# Altium PCB RobotHead.PcbDoc
Units mm, origin at the board's own origin, x right, y up, seen from the top; angles counter-clockwise.
Board outline 98.18 x 50.64 mm, 2 copper layers (Top Layer, Bottom Layer); 29 components, 38 nets, 110 pads, 75 vias.
Unrouted connection lines stored in the file: 2.
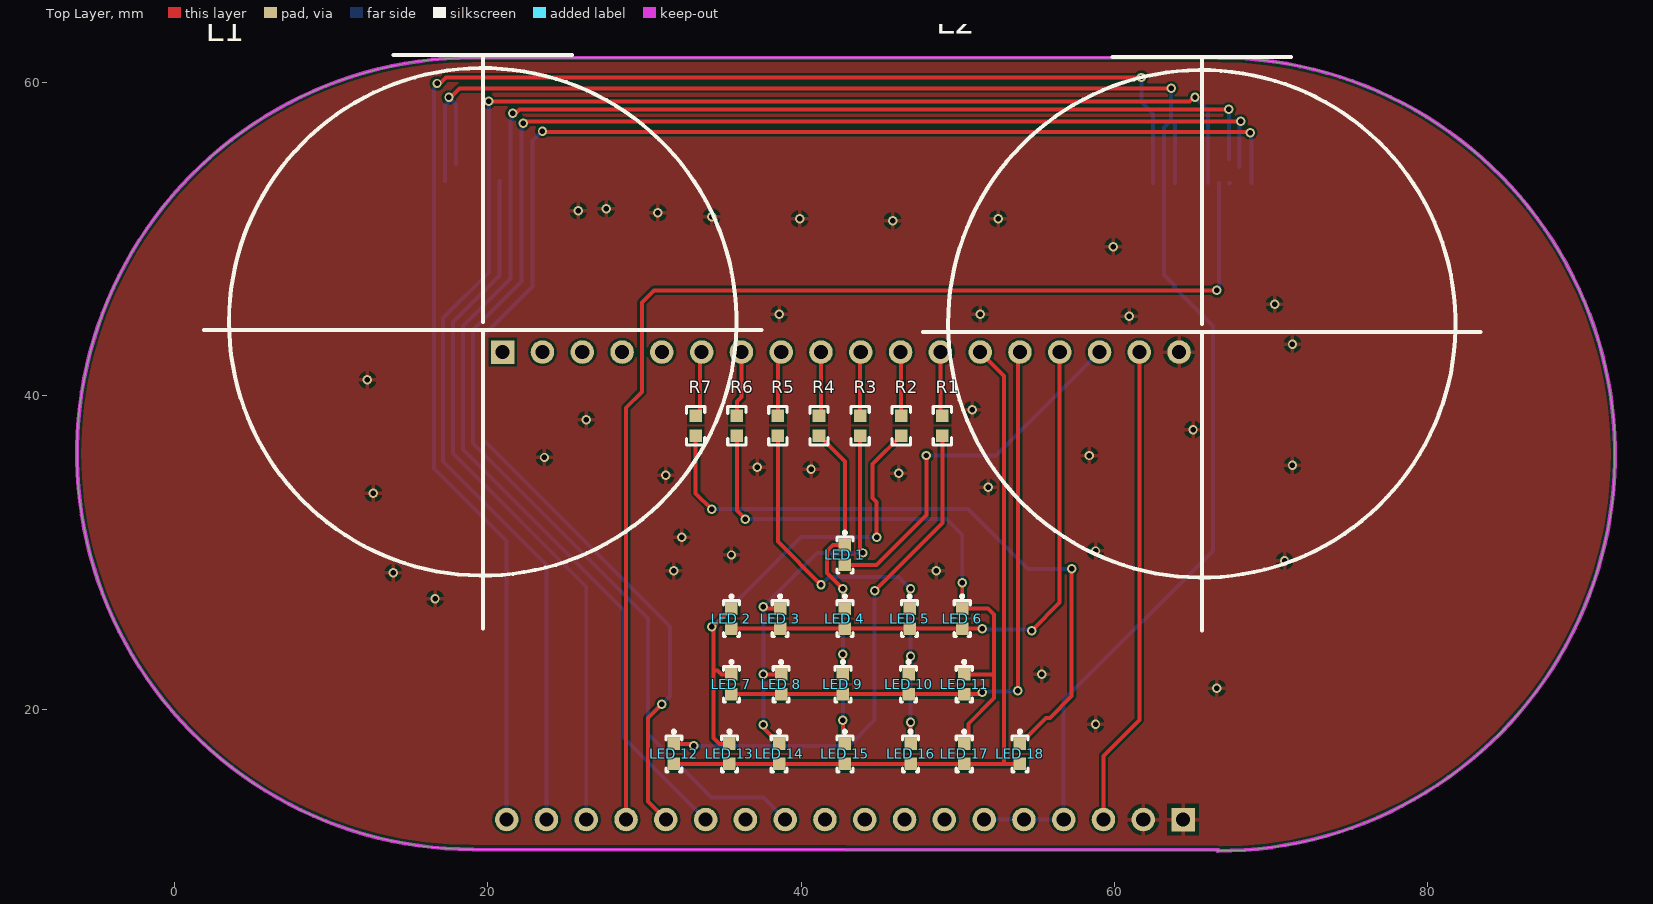
[diagram p0: Top Layer view]
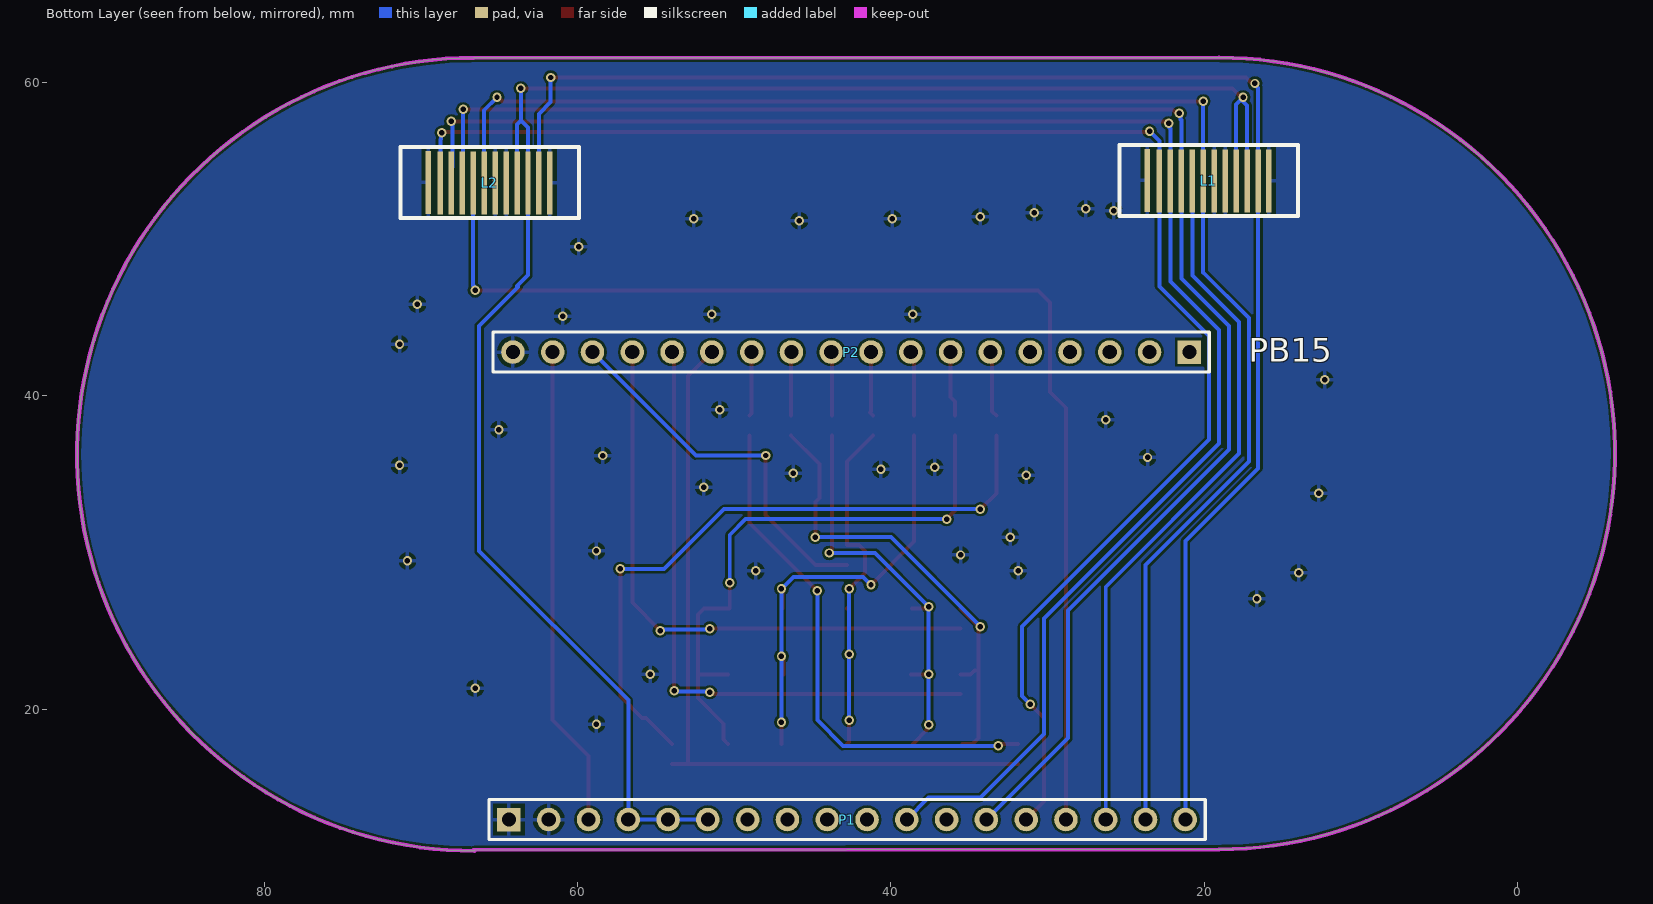
[diagram p1: Bottom Layer view, seen from below]
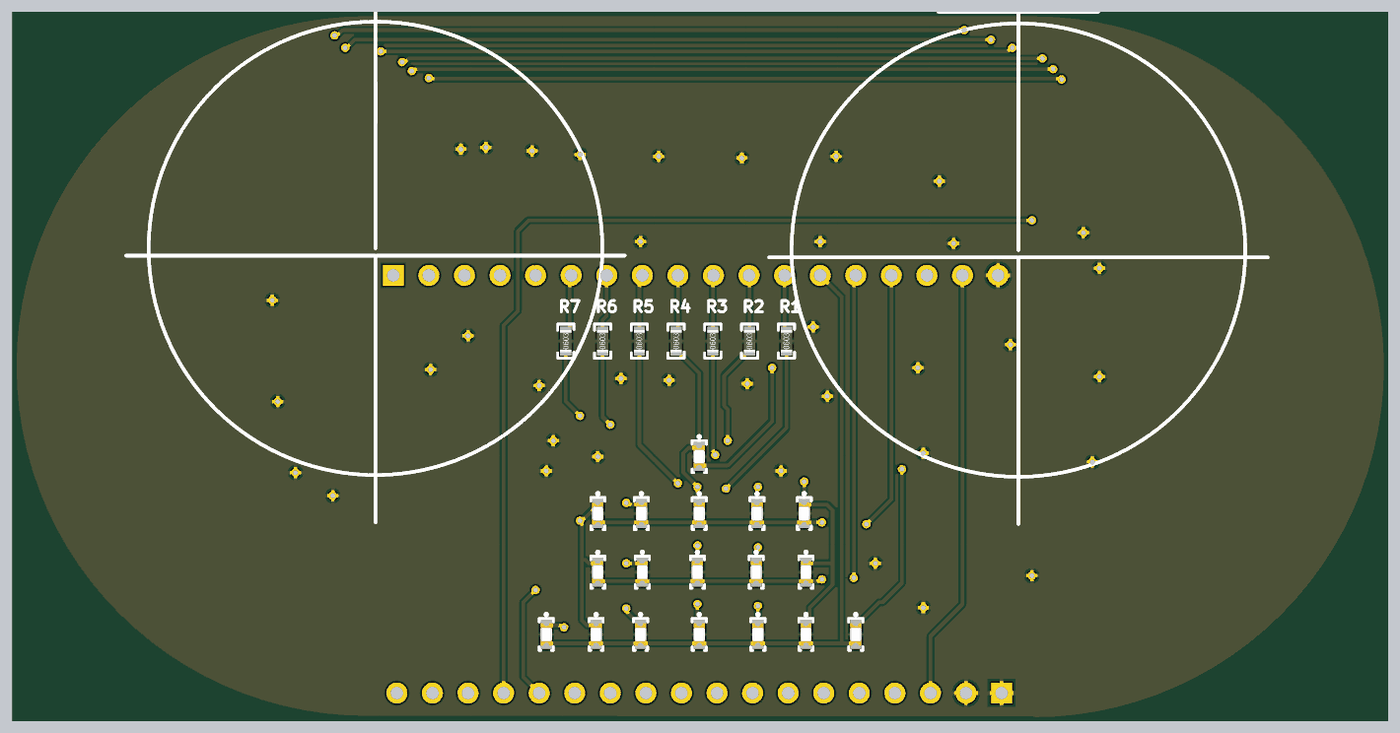
[diagram p2: 3D render of the assembled board from above, using the file's embedded part models]

## Layer stack, top to bottom
Top Solder: solder mask 0.0102, Solder Resist, Dk 3.5
Top Layer: signal copper 0.0356
Dielectric 1: dielectric 0.32, FR-4, Dk 4.8
Bottom Layer: signal copper 0.0356
Bottom Solder: solder mask 0.0102, Solder Resist, Dk 3.5

## Board outline
19.05,11.05 cw(c19.05,36.323) 19.05,61.595 66.647,61.585 cw(c66.647,36.268) 66.589,10.951 66.647,10.995

## Design rules (kind name [scope] priority, off if disabled: settings)
Clearance [All] p1: gap=0.152 ignorepadtopadclearanceinfootprint=FALSE except(0: Arc-Hole Track-Hole SMDPad-Hole THPad-Hole Via-Hole Fill-Hole Poly-Hole Region-Hole Text-Hole; 0.102: Arc-Arc Arc-Track Arc-SMDPad Arc-THPad Track-Track Track-SMDPad Track-THPad SMDPad-SMDPad SMDPad-THPad THPad-THPad)
HoleSize [All] p1: absolutevalues=TRUE maxlimit=30 minlimit=0.025 maxpercent=80.000 minpercent=20.000
HoleToHoleClearance [All] p1: gap=0.152 allowstackedmicrovias=TRUE
MinimumSolderMaskSliver [All] p1: minsoldermaskwidth=0.025
PolygonConnect [All] p1: connectstyle=Relief reliefconductorwidth=0.254 reliefentries=4 polygonreliefangle="90 Angle" airgapwidth=0.254
RoutingVias [All] p1: holewidth=0.711 width=1.27 viastyle="Through Hole" minholewidth=0.3 minwidth=0.5 maxholewidth=30 maxwidth=30
SilkToSilkClearance [All] p1: silktosilkclearance=0
SilkToSolderMaskClearance [IsPad] p1: minsilkscreentomaskgap=0 clearancetoexposedcopper=TRUE
SolderMaskExpansion [All] p1: expansion=0.102 istentingtop=FALSE
Width [All] p1: maxlimit=1 minlimit=0.254 preferedwidth=0.254
25 further rules are at their usual default settings.

## Components (designator, comment, footprint, x,y, rotation, side; value= is the part's Value field where it differs from the comment)
L1 "TFT LED" "LCD-1.28 IPS - (2)" 14.01,53.72 r0 top locked
L2 "TFT LED" "LCD-1.28 IPS - (2)" 59.913,53.593 r0 top locked
"LED 1" "LED 0603" "LED 0603" 42.799,29.845 r90 top locked
"LED 2" "LED 0603" "LED 0603" 35.56,25.781 r90 top locked
"LED 3" "LED 0603" "LED 0603" 38.672,25.781 r90 top locked
"LED 4" "LED 0603" "LED 0603" 42.799,25.781 r90 top locked
"LED 5" "LED 0603" "LED 0603" 46.926,25.781 r90 top locked
"LED 6" "LED 0603" "LED 0603" 50.292,25.781 r90 top locked
"LED 7" "LED 0603" "LED 0603" 35.56,21.59 r90 top locked
"LED 8" "LED 0603" "LED 0603" 38.735,21.59 r90 top locked
"LED 9" "LED 0603" "LED 0603" 42.672,21.59 r90 top locked
"LED 10" "LED 0603" "LED 0603" 46.863,21.59 r90 top locked
"LED 11" "LED 0603" "LED 0603" 50.419,21.59 r90 top locked
"LED 12" "LED 0603" "LED 0603" 31.877,17.145 r90 top locked
"LED 13" "LED 0603" "LED 0603" 35.433,17.145 r90 top locked
"LED 14" "LED 0603" "LED 0603" 38.608,17.145 r90 top locked
"LED 15" "LED 0603" "LED 0603" 42.799,17.145 r90 top locked
"LED 16" "LED 0603" "LED 0603" 46.99,17.145 r90 top locked
"LED 17" "LED 0603" "LED 0603" 50.419,17.145 r90 top locked
"LED 18" "LED 0603" "LED 0603" 53.975,17.145 r90 top locked
P1 "Header 18" HDR1X18 64.389,12.954 r180 bottom locked
P2 "Header 18" HDR1X18 20.955,42.799 r0 bottom locked
R1 "10KR" CR1608-0603 49.022,38.1 r90 top
R2 "10KR" CR1608-0603 46.397,38.1 r90 top
R3 "10KR" CR1608-0603 43.773,38.1 r90 top
R4 "10KR" CR1608-0603 41.148,38.1 r90 top
R5 "10KR" CR1608-0603 38.523,38.1 r90 top
R6 "10KR" CR1608-0603 35.899,38.1 r90 top
R7 "10KR" CR1608-0603 33.274,38.1 r90 top

## Footprints (in the part's own frame and the unit in brackets; to place one, negate y for a bottom-side part, rotate by r counter-clockwise, add the part's x,y. Pads: shape width x height; smd on the part's side, far side on the other; paste and mask are expansions set on the pad)
CR1608-0603 [mm]
  rect 0.8x0.8 smd: 1(-0.635,0) 2(0.635,0)
  silkscreen extent -1.23,-0.58 1.23,0.58, body extent -0.8,-0.4 0.8,0.4, height 0.45
HDR1X18 [mm] "Connector; Header; 18 Position"
  rect 1.5x1.5 hole 0.9: 1(0,0)
  round 1.5 hole 0.9: 2(2.54,0) 3(5.08,0) 4(7.62,0) 5(10.16,0) 6(12.7,0) 7(15.24,0) 8(17.78,0) 9(20.32,0) 10(22.86,0) 11(25.4,0) 12(27.94,0) 13(30.48,0) 14(33.02,0) 15(35.56,0) 16(38.1,0) 17(40.64,0) 18(43.18,0)
  silkscreen extent -1.27,-1.27 44.45,1.27
"LCD-1.28 IPS - (2)" [mm]
  rect 0.35x4 smd far side: 1(1.859,0.001) 2(2.559,0.001) 3(3.259,0.001) 4(3.959,0.001) 5(4.659,0.001) 6(5.359,0.001) 7(6.059,0.001) 8(6.759,0.001) 9(7.459,0.001) 10(8.159,0.001) 11(8.859,0.001) 12(9.622,0.032)
  silkscreen extent -12.13,-28.56 23.47,8.04, body extent -12.12,-28.55 23.52,8.08, height 2.02
"LED 0603" [mm]
  rect 0.8x0.8 smd: 1(-0.635,0) 2(0.635,0)
  silkscreen extent -1.14,-0.51 1.48,0.51, body extent -0.8,-0.4 0.8,0.4, height 0.6

## Part data
L1 L2: library part LCD-IPSscreen-1.28, "1.28寸圆形LCD"
P1 P2: "Header, 18-Pin", LatestRevisionDate=17-Jul-2002, LatestRevisionNote="Re-released for DXP Platform.", Publisher="Altium Limited"
R1 R2 R3 R4 R5 R6 R7: library part "Chip resistor", "贴片电阻"

## Via types
v1: diameter 0.6, hole 0.35, Top Layer to Bottom Layer, 75 vias

## Nets (pads, with @x,y where several pads share a name; then routed paths per layer and width w, separated by ;. In a path a pad name is that pad's centre, name@x,y a point inside that pad or via, vN(x,y) a via of type N, cw(c..) or ccw(c..) an arc to the next point about the centre after c; other vN are vias at no path point)
+5: P1.3 P2.17 | length 30.8
  Top Layer w0.254: P1.3 59.309,17.018 61.595,19.304 P2.17
GND: L1.1 L1.5 L1.6 L1.12 L2.1 L2.5 L2.6 L2.12 P1.1 P1.2 P2.18
  other v1: 58.801,19.05 66.548,21.336 55.372,22.225 16.637,27.051 13.97,28.702 31.877,28.829 48.641,28.829 70.866,29.464 35.56,29.845 58.801,30.099 32.385,30.988 12.7,33.782 51.943,34.163 31.369,34.925 46.228,35.052 40.64,35.306 37.211,35.433 71.374,35.56 23.622,36.068 58.409,36.193 65.024,37.846 26.289,38.481 50.927,39.116 12.319,41.021 71.374,43.307 60.96,45.085 38.608,45.212 51.435,45.212 70.231,45.847 59.944,49.53 45.847,51.181 39.906,51.306 52.578,51.308 34.29,51.435 30.861,51.689 25.781,51.816 27.559,51.943
LCD_DC: L1.7 L2.7 P1.17 | length 100.8
  Top Layer w0.254: v1(20.066,58.801) 64.803,58.801 65.057,59.055 v1(65.151,59.055)
  Bottom Layer w0.254: v1(20.066,58.801) 20.066,53.724 L1.7 20.066,53.718 20.066,47.879 17.145,44.958 17.145,35.814 23.749,29.21 P1.17 ; v1(65.151,59.055) 65.972,58.234 L2.7
LCD_RES: L1.11 L2.11 P1.14 | length 100.1
  Top Layer w0.254: v1(23.495,56.896) 23.542,56.849 68.627,56.849 v1(68.674,56.802) ; v1(31.115,20.32) 30.226,19.431 30.226,14.097 31.242,13.081 31.369,13.081 P1.14
  Bottom Layer w0.254: v1(23.495,56.896) 22.866,56.267 22.866,50.419 22.866,46.996 19.685,43.815 19.685,37.211 31.623,25.273 31.623,20.828 v1(31.115,20.32) ; v1(68.674,56.802) 68.74,56.736 68.74,56.394 68.772,56.362 L2.11
LED_H1: P2.12 R1.2 | length 4.1
  Top Layer w0.254: P2.12 48.895,38.878 49.03,38.743 R1.2
LED_H2: P2.11 R2.2 | length 4.1
  Top Layer w0.254: P2.11 46.397,42.757 R2.2
LED_H3: P2.10 R3.2 | length 4.1
  Top Layer w0.254: R3.2 43.773,42.757 P2.10
LED_H4: P2.9 R4.2 | length 4.2
  Top Layer w0.254: R4.2 41.355,38.942 41.341,38.942 41.275,39.008 P2.9
LED_H5: P2.8 R5.2 | length 4.2
  Top Layer w0.254: R5.2 38.523,42.587 P2.8
LED_H6: P2.7 R6.2 | length 4.2
  Top Layer w0.254: R6.2 35.899,39.628 36.195,39.924 P2.7
LED_H7: P2.6 R7.2 | length 4.2
  Top Layer w0.254: R7.2 33.547,39.008 33.547,42.691 P2.6
LED_W1: "LED 1.1" P2.16 | length 24.1
  Top Layer w0.254: 42.799,29.21 44.831,29.21 48.006,32.385 v1(48.006,36.195)
  Bottom Layer w0.254: v1(48.006,36.195) 52.451,36.195 P2.16
LED_W2: "LED 2.1" "LED 3.1" "LED 4.1" "LED 5.1" "LED 6.1" P2.15 | length 37.7
  Top Layer w0.254: 35.56,25.146 38.672,25.146 42.799,25.146 46.926,25.146 50.292,25.146 v1(51.562,25.146) ; v1(54.737,25.019) 56.515,26.797 P2.15
  Bottom Layer w0.254: v1(51.562,25.146) 51.625,25.082 54.673,25.082 v1(54.737,25.019)
LED_W3: "LED 7.1" "LED 8.1" "LED 9.1" "LED 10.1" "LED 11.1" P2.14 | length 40
  Top Layer w0.254: 35.56,20.955 38.735,20.955 42.672,20.955 46.863,20.955 50.419,20.955 51.435,20.955 v1(51.562,21.082) ; v1@53.848,21.209 53.848,42.672 P2.14
  Bottom Layer w0.254: v1(51.562,21.082) 51.613,21.133 53.777,21.133 v1(53.829,21.185)
LED_W4: "LED 12.1" "LED 13.1" "LED 14.1" "LED 15.1" "LED 16.1" "LED 17.1" "LED 18.1" P2.13 | length 49
  Top Layer w0.254: 31.877,16.51 35.433,16.51 38.608,16.51 42.799,16.51 46.99,16.51 50.419,16.51 52.959,16.51 ; P2.13 52.959,41.275 52.959,16.51 ; 53.975,16.51 52.959,16.51
LEDK: L1.2 L2.2 P1.18 | length 101.2
  Top Layer w0.254: v1(16.764,59.944) 16.83,60.01 17.025,60.01 17.34,60.325 v1(61.722,60.325)
  Bottom Layer w0.254: v1(16.764,59.944) 16.764,59.85 16.569,59.655 16.569,53.724 16.566,53.721 16.566,35.377 21.209,30.734 P1.18 ; v1(61.722,60.325) 61.722,58.754 62.472,58.004 L2.2
"NetLED 1_2": "LED 1.2" "LED 4.2" "LED 9.2" "LED 15.2" R4.1 | length 24.5
  Top Layer w0.254: R4.1 42.799,35.814 42.799,30.48 42.037,30.48 41.656,30.099 41.656,28.702 v1(42.672,27.686) 42.672,26.543 42.799,26.416 ; v1(42.672,19.304) 42.672,17.907 42.799,17.78 ; 42.672,22.225 v1(42.672,23.495)
  Bottom Layer w0.254: v1(42.672,19.304) v1(42.672,23.495) v1(42.672,27.686) v1@42.799,27.813
"NetLED 2_2": "LED 2.2" "LED 7.2" "LED 13.2" R2.1 | length 31.4
  Top Layer w0.254: 35.433,17.78 34.798,17.78 34.417,18.161 34.417,22.479 ; 35.56,22.225 34.925,22.225 34.671,22.479 34.417,22.479 ; 35.56,26.416 34.417,25.273 34.417,22.479 ; v1(44.831,30.988) 44.831,33.236 44.577,33.49 44.577,35.645 R2.1
  Bottom Layer w0.254: v1(34.29,25.273) 40.005,30.988 v1(44.831,30.988)
"NetLED 3_2": "LED 3.2" "LED 8.2" "LED 14.2" R3.1 | length 26.8
  Top Layer w0.254: v1(37.592,18.994) 37.658,18.928 37.658,18.73 38.608,17.78 ; v1(37.592,22.225) 38.735,22.225 ; v1(37.592,26.543) 37.719,26.416 38.672,26.416 ; R3.1 43.773,30.235 43.942,30.066 v1(43.942,29.972)
  Bottom Layer w0.254: v1(37.592,18.994) v1(37.592,26.543) 41.021,29.972 v1(43.942,29.972)
"NetLED 5_2": "LED 5.2" "LED 10.2" "LED 16.2" R5.1 | length 29
  Top Layer w0.254: R5.1 38.523,30.692 v1(41.275,27.94) ; 46.863,22.225 v1@46.863,23.147 ; 46.926,26.416 46.926,27.622 v1(46.99,27.686) ; 46.99,17.78 v1(46.99,19.177)
  Bottom Layer w0.254: v1(41.275,27.94) 41.783,28.448 46.228,28.448 v1(46.99,27.686) v1(46.99,23.368) v1(46.99,19.177)
"NetLED 6_2": "LED 6.2" "LED 11.2" "LED 17.2" R6.1 | length 37.7
  Top Layer w0.254: R6.1 35.899,32.681 v1(36.449,32.131) ; v1(50.292,28.067) 50.292,26.416 51.943,26.416 52.324,26.035 52.324,22.098 ; 50.419,17.78 50.692,18.053 50.692,19.069 52.324,20.701 52.324,22.098 ; 50.419,22.225 52.197,22.225 52.324,22.098
  Bottom Layer w0.254: v1(36.449,32.131) 49.276,32.131 50.292,31.115 v1(50.292,28.067)
"NetLED 12_2": "LED 12.2" R1.1 | length 33.5
  Top Layer w0.254: 31.877,17.78 32.926,17.78 33.053,17.653 v1(33.147,17.653) ; v1(44.704,27.559) 49.022,31.877 R1.1
  Bottom Layer w0.254: v1(33.147,17.653) 43.053,17.653 44.704,19.304 v1(44.704,27.559)
"NetLED 18_2": "LED 18.2" R7.1 | length 42.4
  Top Layer w0.254: R7.1 33.274,33.782 v1(34.29,32.766) ; 53.975,17.78 55.636,19.441 55.89,19.441 57.277,20.828 v1(57.277,28.956)
  Bottom Layer w0.254: v1(34.29,32.766) 50.673,32.766 54.483,28.956 v1(57.277,28.956)
PA2: L1.8 P1.16 | length 45.5
  Bottom Layer w0.254: L1.8 20.766,53.718 20.766,47.69 17.78,44.704 17.78,36.322 26.289,27.813 P1.16
PA3: L2.8 P1.15 | length 77.4
  Top Layer w0.254: P1.15 28.829,39.243 29.845,40.259 29.845,45.974 30.607,46.736 v1(66.548,46.736)
  Bottom Layer w0.254: v1(66.548,46.736) 66.614,46.802 66.614,47 66.672,47.058 L2.8
PA5: L1.9 L2.9 P1.13 | length 101.9
  Top Layer w0.254: v1(21.59,58.039) 21.656,58.105 21.851,58.105 22.039,58.293 v1(67.31,58.293)
  Bottom Layer w0.254: v1(21.59,58.039) 21.524,57.973 21.524,57.656 21.466,57.598 21.466,53.724 L1.9 21.466,53.718 21.466,47.501 18.415,44.45 18.415,36.576 28.702,26.289 28.702,18.161 P1.13 ; L2.9@67.306,55.109 67.306,58.289 v1(67.31,58.293) ; L2.9@67.324,53.546 L2.9
PA6: P1.12
PA7: L1.10 L2.10 P1.11 | length 104.8
  Top Layer w0.254: v1(22.273,57.398) 22.366,57.398 22.5,57.531 v1(68.072,57.531)
  Bottom Layer w0.254: v1(22.273,57.398) 22.206,57.331 22.206,57.113 22.169,57.076 L1.10 22.166,53.718 22.166,47.312 19.05,44.196 19.05,36.957 30.226,25.781 30.226,18.415 34.29,14.351 37.592,14.351 P1.11 ; L2.10@68.006,54.616 68.006,57.465 v1(68.072,57.531)
PA8: P1.10
PA11: P1.9
PA12: P1.8
PA15: P1.7
PB11: P2.5
PB12: P2.4
PB13: P2.3
PB14: P2.2
PB15: P2.1
VCC: L1.3 L1.4 L2.3 L2.4 P1.4 P1.5 P1.6 | length 117.5
  Top Layer w0.254: v1(17.526,59.055) 17.616,59.055 18.195,59.634 v1(63.627,59.634)
  Bottom Layer w0.254: L1.3@17.266,53.721 17.266,58.541 v1@17.653,58.928 ; v1(17.526,59.055) v1@17.653,58.928 ; L1.4@17.966,54.796 17.966,58.615 v1@17.653,58.928 ; P1.6 P1.5 P1.4 56.769,20.574 66.294,30.099 66.294,44.45 63.806,46.938 63.872,47.004 63.172,47.704 L2.3 63.172,57.125 63.627,57.58 ; v1(63.627,59.634) 63.627,57.58 ; L2.4 63.872,57.335 63.627,57.58

## Polygon pours and split planes (outlines as drawn)
GND on Top Layer "GND_L01_P001" (solid, pour order 1): 19.05,11.05 cw(c19.05,36.323) 19.05,61.595 66.647,61.585 cw(c66.647,36.268) 66.589,10.951 66.647,10.995
GND on Bottom Layer "GND_L02_P000" (solid, pour order 0): 19.05,11.05 cw(c19.05,36.323) 19.05,61.595 66.647,61.585 cw(c66.647,36.268) 66.589,10.951 66.647,10.995

## Keep-outs
Keep-Out Layer:
  lines w0.254: 66.589,10.951 ccw(c66.647,36.268) 66.647,61.585 19.05,61.595 ccw(c19.05,36.323) 19.05,11.05 66.647,10.995

## Silkscreen, mask and mechanical layers (free items; w line width, h text height)
Bottom Overlay:
  text "PB15" at 17.145,42.164 h1.52